# Altium PCB PCB_BLU_2.PcbDoc
Units mm, origin at the board's own origin, x right, y up, seen from the top; angles counter-clockwise.
Board outline 32.18 x 84.97 mm, 2 copper layers (Top, Bottom); 74 components, 57 nets, 307 pads, 100 vias.
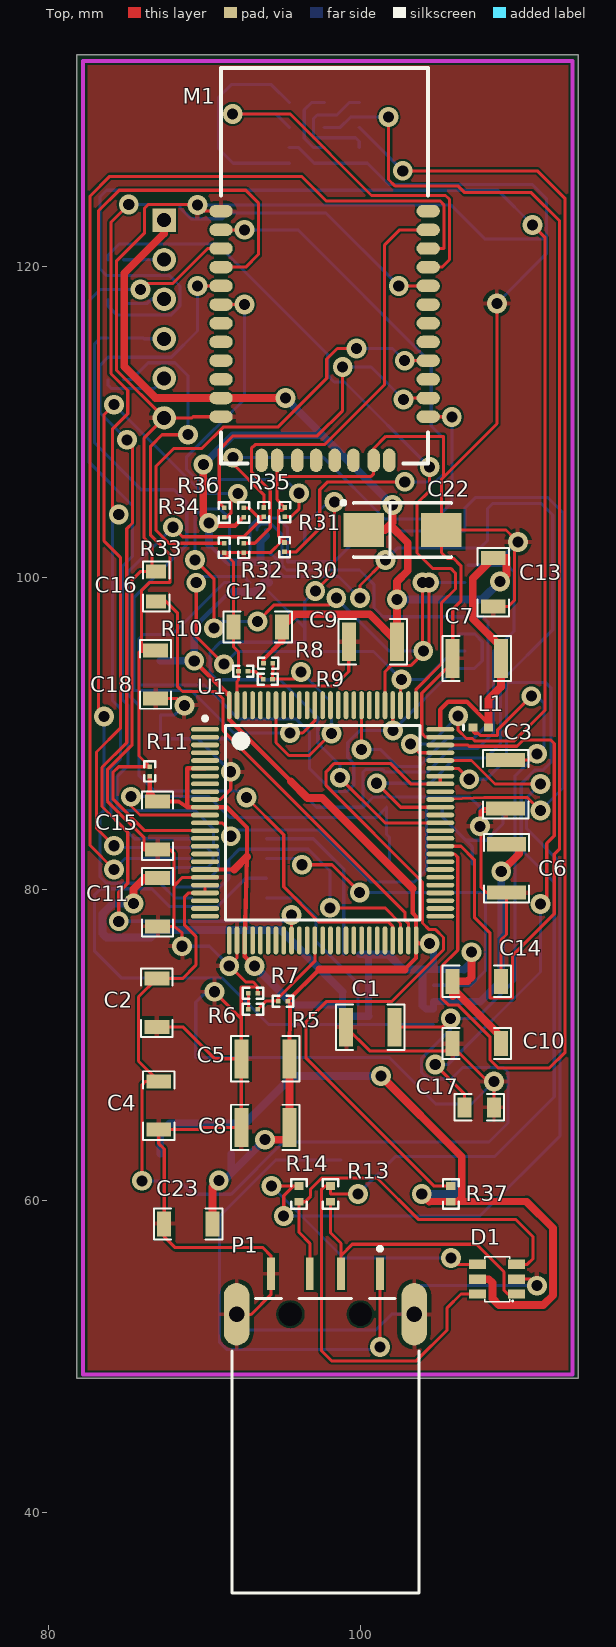
[diagram p0: Top view]
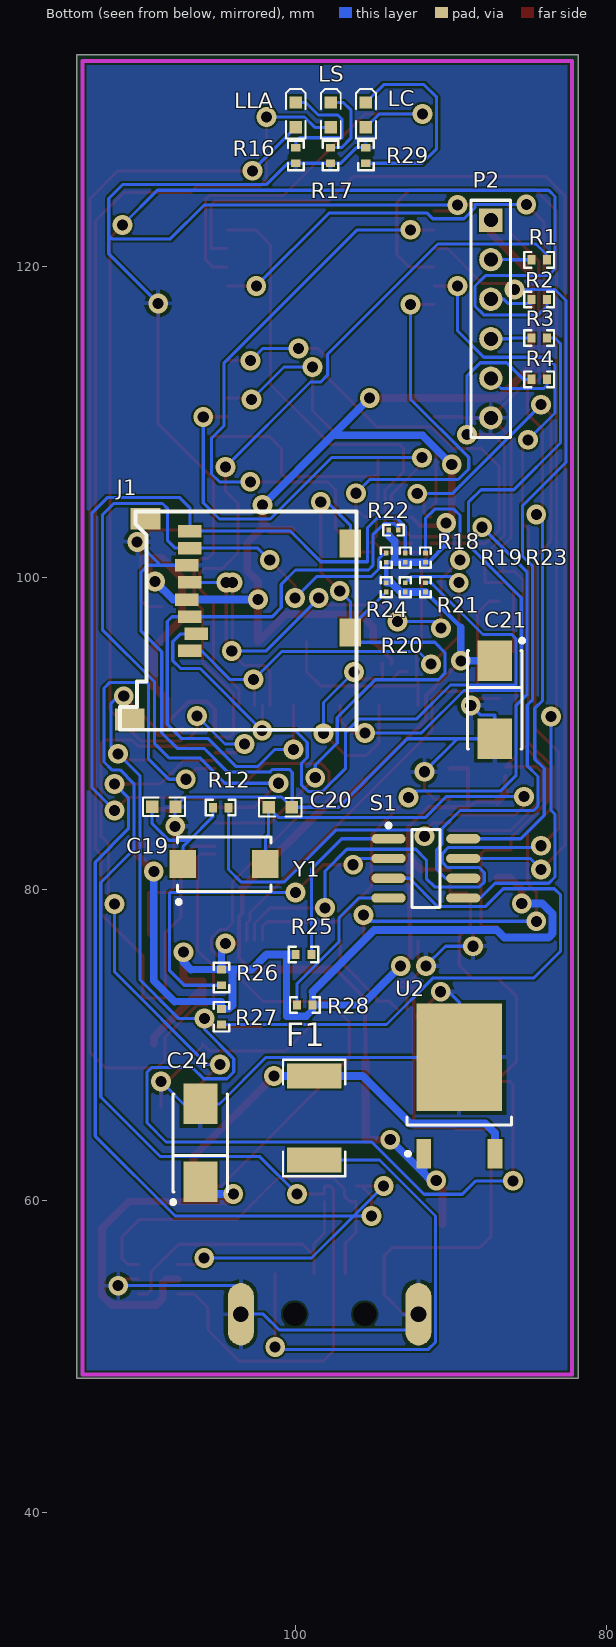
[diagram p1: Bottom view, seen from below]
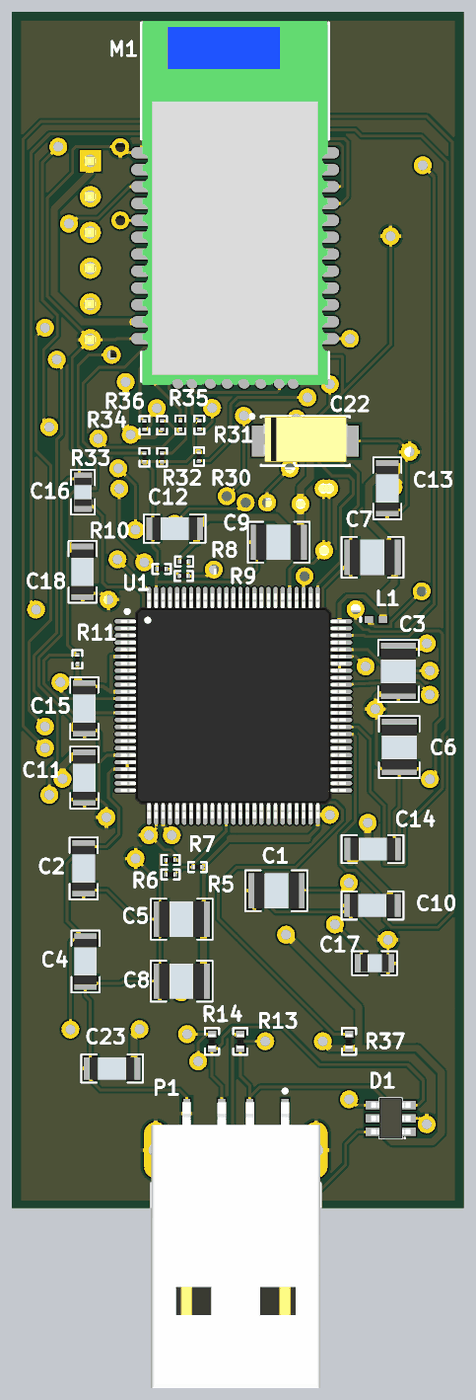
[diagram p2: 3D render of the assembled board from above, using the file's embedded part models]
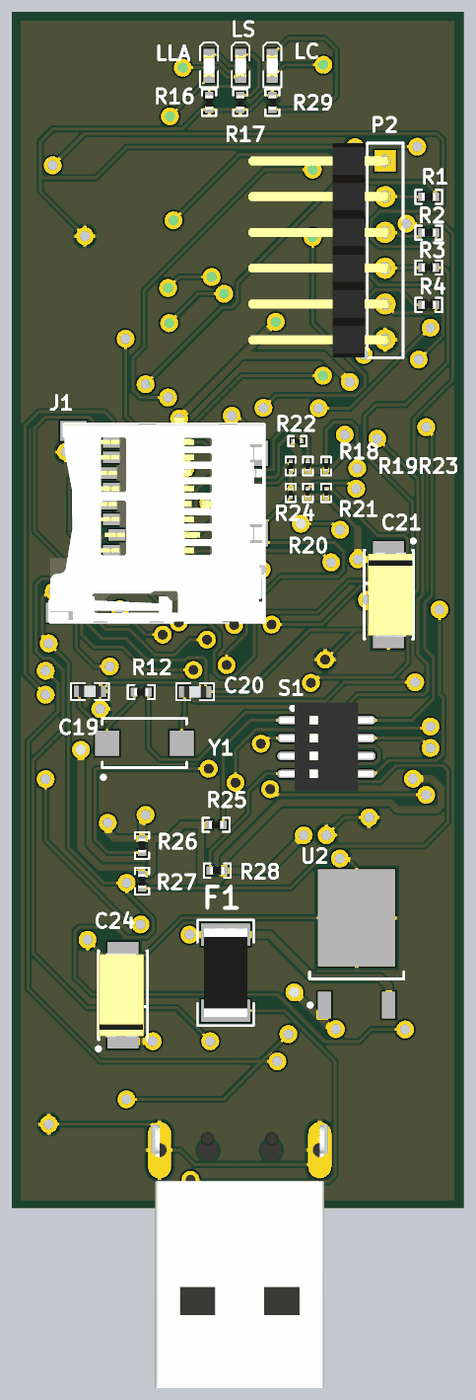
[diagram p3: 3D render of the assembled board from below, using the file's embedded part models]

## Layer stack, top to bottom
Top Solder: solder mask 0.0102, Solder Resist, Dk 3.5
Top: signal copper 0.0356
Dielectric 1: dielectric 0.32, FR-4, Dk 4.8
Bottom: signal copper 0.0356
Bottom Solder: solder mask 0.0102, Solder Resist, Dk 3.5

## Board outline
81.825,48.6 81.825,133.575 114,133.575 114,48.6

## Design rules (kind name [scope] priority, off if disabled: settings)
Clearance Clearance_U1_0.1mm [(ObjectKind = 'Pad') And (Component = 'U1')] p1: gap=0.1
Clearance Clearance_ALL [All] p2: gap=0.15
PolygonConnect [All] p1: connectstyle=Relief reliefconductorwidth=0.254 reliefentries=4 polygonreliefangle="90 Angle" airgapwidth=0.254
RoutingVias [All] p1: holewidth=0.711 width=1.27 viastyle="Through Hole" minholewidth=0.711 minwidth=1.27 maxholewidth=0.711 maxwidth=1.27
SMDNeckDown [All] p1: percent=90.000
SolderMaskExpansion [All] p1: expansion=0.102
Width "Schematic Width Constraint_1" [InNet('NetC1_1')] p1: maxlimit=0.3 minlimit=0.1 preferedwidth=0.2
Width "Schematic Width Constraint" [InNet('GND')] p2: maxlimit=0.3 minlimit=0.1 preferedwidth=0.2
Width Width_GND_0.5mm [InNet('GND')] p3: maxlimit=0.5 minlimit=0.254 preferedwidth=0.5
Width Width_3.3_0.5mm [InNet('VDD')] p4: maxlimit=0.5 minlimit=0.254 preferedwidth=0.5
Width Width_5V_0.5mm [InNet('VUSB')] p5: maxlimit=0.5 minlimit=0.254 preferedwidth=0.5
Width [All] p6: maxlimit=0.2 minlimit=0.2 preferedwidth=0.2
30 further rules are at their usual default settings.

## Classes and differential pairs
component class PCB_BLU: C1 C2 C3 C4 C5 C6 C7 C8 C9 C10 C11 C12 C13 C14 C15 C16 C17 C18 C19 C20 L1 LLA LS P2 R1 R2 R3 R4 R5 R6 R7 R8 R9 R10 R11 R12 R16 R17 U1 Y1
component class PCB_BLU3: C23 C24 D1 F1 P1 R13 R14 R37 U2
component class PCB_BLU2: C22 LC M1 R25 R26 R27 R28 R29 R30 R31 R32 R33 R34 R35 R36 S1
component class PCB_BLU1: C21 J1 R18 R19 R20 R21 R22 R23 R24

## Components (designator, comment, footprint, x,y, rotation, side; value= is the part's Value field where it differs from the comment)
C1 "1μF" "WCAP-CSGP 1210, H=1.25mm" 100.65,71.15 r180 top
C2 "100 nF" "WCAP-CSGP 1206, H=0.8mm" 86.95,72.725 r270 top
C3 "1μF" "WCAP-CSGP 1210, H=1.25mm" 109.35,86.75 r90 top
C4 "100 nF" "WCAP-CSGP 1206, H=0.8mm" 87.075,66.125 r90 top
C5 "1μF" "WCAP-CSGP 1210, H=1.25mm" 93.925,69.125 r0 top
C6 "1μF" "WCAP-CSGP 1210, H=1.25mm" 109.4,81.35 r90 top
C7 "1μF" "WCAP-CSGP 1210, H=1.25mm" 107.5,94.825 r0 top
C8 "1μF" "WCAP-CSGP 1210, H=1.25mm" 93.925,64.725 r0 top
C9 "1μF" "WCAP-CSGP 1210, H=1.25mm" 100.825,95.9 r0 top
C10 "100 nF" "WCAP-CSGP 1206, H=0.8mm" 107.5,70.1 r0 top
C11 "100 nF" "WCAP-CSGP 1206, H=0.8mm" 87,79.175 r90 top
C12 "100 nF" "WCAP-CSGP 1206, H=0.8mm" 93.425,96.85 r0 top
C13 "100 nF" "WCAP-CSGP 1206, H=0.8mm" 108.55,99.725 r90 top
C14 "100 nF" "WCAP-CSGP 1206, H=0.8mm" 107.5,74.1 r180 top
C15 "100 nF" "WCAP-CSGP 1206, H=0.8mm" 87,84.1 r90 top
C16 "2.2μF" "WCAP-CSGP 0805, H=1.25mm" 86.9,99.45 r90 top
C17 "2.2μF" "WCAP-CSGP 0805, H=1.25mm" 107.65,66 r0 top
C18 "100 nF" "WCAP-CSGP 1206, H=0.8mm" 86.875,93.8 r90 top
C19 "20 pF" "WCAP-CSGP 0603, H=0.8mm" 108.425,85.3 r0 bottom
C20 "20 pF" "WCAP-CSGP 0603, H=0.8mm" 100.95,85.275 r0 bottom
C21 "22uF" 6032 87.175,92.175 r270 bottom
C22 "22uF" 6032 102.725,103.075 r0 top
C23 "100 nF" "WCAP-CSGP 1206, H=0.8mm" 88.975,58.525 r0 top
C24 "22uF" 6032 106.075,63.725 r90 bottom
D1 "VDC = 5V" SOT23-6L 108.8,54.975 r90 top
F1 "300mA" RES2512R 98.775,65.325 r270 bottom
J1 "MICROSD" MICROSD 96.05,104.25 r90 bottom
L1 "Inductor" 0402-A 107.75,90.4 r0 top
LC "150060BS75000" LED_0603_Blue 95.45,129.725 r90 bottom
LLA "150060RS75000" LED_0603_Red 99.95,129.725 r90 bottom
LS "150060GS75000" LED_0603_Green 97.7,129.725 r90 bottom
M1 "RN42 Module" RN42-LAND 91.075,107.35 r0 top
P1 "1470695-4" 1470695A 97.775,50.025 r270 top
P2 "SWD" HDR1X6 87.425,122.975 r270 bottom
R1 "22" RES0402R 84.325,120.425 r180 bottom
R2 "22" RES0402R 84.325,117.875 r180 bottom
R3 "22" RES0402R 84.325,115.4 r180 bottom
R4 "22" RES0402R 84.325,112.75 r0 bottom
R5 "10k" RES0201R 95.05,72.825 r0 top
R6 "510" RES0201R 93.125,72.3 r0 top
R7 "0" RES0201R 93.125,73.325 r180 top
R8 "10k" RES0201R 94.1,94.525 r180 top
R9 "510" RES0201R 94.075,93.5 r0 top
R10 "0" RES0201R 92.5,94 r0 top
R11 "100k" RES0201R 86.5,87.575 r90 top
R12 "220" RES0402R 104.775,85.25 r180 bottom
R13 "22" RES0402R 98.1,60.45 r90 top
R14 "22" RES0402R 96.075,60.45 r90 top
R16 "510" RES0402R 99.95,127.125 r90 bottom
R17 "510" RES0402R 97.725,127.125 r90 bottom
R18 "100kOm" RES0201R 94.15,101.3 r270 bottom
R19 "100kOm" RES0201R 92.925,101.3 r270 bottom
R20 "100kOm" RES0201R 92.925,99.4 r270 bottom
R21 "100kOm" RES0201R 91.625,99.4 r270 bottom
R22 "100kOm" RES0201R 93.675,103.075 r0 bottom
R23 "100kOm" RES0201R 91.625,101.3 r270 bottom
R24 "100kOm" RES0201R 94.15,99.4 r270 bottom
R25 "100k" RES0402R 99.45,75.825 r0 bottom
R26 "100k" RES0402R 104.725,74.35 r90 bottom
R27 "100k" RES0402R 104.725,71.825 r90 bottom
R28 "100k" RES0402R 99.375,72.575 r180 bottom
R29 "510" RES0402R 95.45,127.125 r90 bottom
R30 "100k" RES0201R 95.15,101.975 r90 top
R31 "100k" RES0201R 95.175,104.225 r90 top
R32 "100k" RES0201R 92.525,101.925 r90 top
R33 "100k" RES0201R 91.275,101.925 r90 top
R34 "510" RES0201R 91.275,104.2 r90 top
R35 "510" RES0201R 93.825,104.225 r90 top
R36 "100k" RES0201R 92.525,104.2 r90 top
R37 "22" RES0402R 105.825,60.45 r90 top
S1 "SW DIP-4" SO8_N 91.6,81.35 r180 bottom
U1 "STM32F407VGT6" STM-LQFP100_N 97.6,84.275 r0 top
U2 "LP38690DTX-3.3" TD03B_N 89.45,67.375 r90 bottom
Y1 "8 Mhz" 3SMXA 104.55,81.625 r180 bottom

## Footprints (in the part's own frame and the unit in brackets; to place one, negate y for a bottom-side part, rotate by r counter-clockwise, add the part's x,y. Pads: shape width x height; smd on the part's side, far side on the other; paste and mask are expansions set on the pad)
3SMXA [mm] "Quartz Crystal, SM; Body 6.2 x 3.7 mm (LxW max)"
  rect 1.7x1.8 smd: 1(-2.65,0) 2(2.65,0)
  silkscreen extent -3.04,-2.55 3,1.75, body extent -2.7,-1.4 2.7,1.4, height 1.3
0402-A [mm] "Chip Inductor, Body 1.0x0.5mm, IPC High Density"
  rect 0.6x0.5 smd: 1(-0.5,0) 2(0.5,0)
  silkscreen extent -1.1,-0.15 -1.1,0.15, body extent -0.55,-0.3 0.55,0.3, height 0.55
6032 [mm] "Capacitor, SM Tantalum; Body 6.0 x 3.2 mm (LxW typ)"
  rect 2.6x2.2 smd: 1(-2.5,0) 2(2.5,0)
  silkscreen extent -3.92,-1.75 3.15,1.87, body extent -3,-1.47 3,1.73, height 2.51
1470695A [mm] "Connector; USB1.1, Type A, SM; 4 Position; Right Angle"
  rect 2.1x0.5 smd: 1(-5.3,3.5) 2(-5.3,1) 3(-5.3,-1) 4(-5.3,-3.5)
  oval 4x1.65 hole 1: 5(-2.7,-5.7) 6(-2.7,5.7)
  round 1.2 hole 1.5 unplated: MH1(-2.7,-2.25) MH2(-2.7,2.25)
  silkscreen extent -7.02,-6 15.2,6, body extent -6.1,-6.3 14.2,6.3, height 3.15
HDR1X6 [mm] "Connector; Header; 6 Position"
  rect 1.5x1.5 hole 0.9: 1(0,0)
  round 1.5 hole 0.9: 2(2.54,0) 3(5.08,0) 4(7.62,0) 5(10.16,0) 6(12.7,0)
  silkscreen extent -1.27,-1.27 13.97,1.27, body extent -1.27,-9.75 13.97,0.38, height 2.51
LED_0603_Blue [mm] "Chip LED, 2-Leads, Body 1.6x0.8mm, IPC Medium Density"
  rect 0.8x0.8 smd: 1(-0.8,0) 2(0.8,0)
  silkscreen extent -1.52,-0.64 1.65,0.64, body extent -0.8,-0.4 0.8,0.4, height 0.7
LED_0603_Green [mm] "Chip LED, 2-Leads, Body 1.6x0.8mm, IPC Medium Density"
  rect 0.8x0.8 smd: 1(-0.8,0) 2(0.8,0)
  silkscreen extent -1.52,-0.64 1.65,0.63, body extent -0.8,-0.4 0.8,0.4, height 0.7
LED_0603_Red [mm] "Chip LED, 2-Leads, Body 1.6x0.8mm, IPC Medium Density"
  rect 0.8x0.8 smd: 1(-0.8,0) 2(0.8,0)
  silkscreen extent -1.52,-0.63 1.65,0.64, body extent -0.8,-0.4 0.8,0.4, height 0.7
MICROSD [mm]
  rect 0.8x1.5 smd: 1(-8.94,10.7) 2(-7.84,10.3) 3(-6.74,10.7) 4(-5.64,10.9) 5(-4.54,10.7) 6(-3.44,10.9) 7(-2.34,10.7) 8(-1.24,10.7)
  rect 1.4x1.9 smd: 9(-13.35,14.55) 9(-0.45,13.55)
  rect 1.8x1.4 smd: 10(-7.75,0.4) 10(-2.05,0.4)
  silkscreen extent -14,0 0,15.2, body extent -14.05,0 0.05,15.2, height 1.85
RES0201R [mm] "resistor 0201 reflow soldering"
  rect 0.3x0.3 smd paste+0 mask+0.075: 1(-0.3,0) 2(0.3,0)
  silkscreen extent -0.65,-0.35 0.65,0.35, body extent -0.3,-0.15 0.3,0.15, height 0.3
RES0402R [mm] "resistor 0402 reflow soldering"
  rect 0.5x0.6 smd: 1(-0.5,0) 2(0.5,0)
  silkscreen extent -0.95,-0.5 0.95,0.5, body extent -0.5,-0.25 0.5,0.25, height 0.3
RES2512R [mm] "resistor 2512 reflow soldering"
  rect 1.6x3.5 smd: 1(-2.7,0) 2(2.7,0)
  silkscreen extent -3.75,-2 3.75,2, body extent -3.15,-1.55 3.15,1.55, height 0.55
RN42-LAND [mm] "RN42 Footprint"
  oval 1.5x0.8 smd: 1(0,16.2) 2(0,15) 3(0,13.8) 4(0,12.6) 5(0,11.4) 6(0,10.2) 7(0,9) 8(0,7.8) 9(0,6.6) 10(0,5.4) 11(0,4.2) 12(0,3) 13(13.3,3) 14(13.3,4.2) 15(13.3,5.4) 16(13.3,6.6) 17(13.3,7.8) 18(13.3,9) 19(13.3,10.2) 20(13.3,11.4) 21(13.3,12.6) 22(13.3,13.8) 23(13.3,15) 24(13.3,16.2)
  oval 0.8x1.5 smd: 28(9.8,0.2) 29(3.6,0.2) 30(10.8,0.2) 31(8.5,0.2) 32(7.3,0.2) 33(6.1,0.2) 34(4.9,0.2) 35(2.6,0.2)
  silkscreen extent 0,0 13.3,25.4, body extent 0.05,-0.27 13.25,25.53, height 2.1
SO8_N [mm] "SOIC, 8-Leads, Body 4.9x3.9mm, Pitch 1.27mm, IPC Medium Density"
  oval 2.2x0.6 smd: 1(-2.4,1.905) 2(-2.4,0.635) 3(-2.4,-0.635) 4(-2.4,-1.905) 5(2.4,-1.905) 6(2.4,-0.635) 7(2.4,0.635) 8(2.4,1.905)
  silkscreen extent -2.53,-2.5 0.9,2.88, body extent -3.35,-3.15 3.35,3.16, height 1.55
SOT23-6L [mm] "WE-TVS TVS Diode, Body 2.9*2.8mm, 6 leads"
  rect 0.6x1.1 smd: 1(-0.95,-1.25) 2(0,-1.25) 3(0.95,-1.25) 4(0.95,1.25) 5(0,1.25) 6(-0.95,1.25)
  silkscreen extent -1.45,-1.03 1.45,0.8, body extent -1.45,-1.4 1.45,1.4, height 1.12
STM-LQFP100_N [mm] "Thin QFP, 100-Leads, Body 14x14mm, Pitch 0.5mm, IPC Medium Density"
  oval 1.8x0.3 smd: 1(-7.55,6) 2(-7.55,5.5) 3(-7.55,5) 4(-7.55,4.5) 5(-7.55,4) 6(-7.55,3.5) 7(-7.55,3) 8(-7.55,2.5) 9(-7.55,2) 10(-7.55,1.5) 11(-7.55,1) 12(-7.55,0.5) 13(-7.55,0) 14(-7.55,-0.5) 15(-7.55,-1) 16(-7.55,-1.5) 17(-7.55,-2) 18(-7.55,-2.5) 19(-7.55,-3) 20(-7.55,-3.5) 21(-7.55,-4) 22(-7.55,-4.5) 23(-7.55,-5) 24(-7.55,-5.5) 25(-7.55,-6) 51(7.55,-6) 52(7.55,-5.5) 53(7.55,-5) 54(7.55,-4.5) 55(7.55,-4) 56(7.55,-3.5) 57(7.55,-3) 58(7.55,-2.5) 59(7.55,-2) 60(7.55,-1.5) 61(7.55,-1) 62(7.55,-0.5) 63(7.55,0) 64(7.55,0.5) 65(7.55,1) 66(7.55,1.5) 67(7.55,2) 68(7.55,2.5) 69(7.55,3) 70(7.55,3.5) 71(7.55,4) 72(7.55,4.5) 73(7.55,5) 74(7.55,5.5) 75(7.55,6)
  oval 0.3x1.8 smd: 26(-6,-7.55) 27(-5.5,-7.55) 28(-5,-7.55) 29(-4.5,-7.55) 30(-4,-7.55) 31(-3.5,-7.55) 32(-3,-7.55) 33(-2.5,-7.55) 34(-2,-7.55) 35(-1.5,-7.55) 36(-1,-7.55) 37(-0.5,-7.55) 38(0,-7.55) 39(0.5,-7.55) 40(1,-7.55) 41(1.5,-7.55) 42(2,-7.55) 43(2.5,-7.55) 44(3,-7.55) 45(3.5,-7.55) 46(4,-7.55) 47(4.5,-7.55) 48(5,-7.55) 49(5.5,-7.55) 50(6,-7.55) 76(6,7.55) 77(5.5,7.55) 78(5,7.55) 79(4.5,7.55) 80(4,7.55) 81(3.5,7.55) 82(3,7.55) 83(2.5,7.55) 84(2,7.55) 85(1.5,7.55) 86(1,7.55) 87(0.5,7.55) 88(0,7.55) 89(-0.5,7.55) 90(-1,7.55) 91(-1.5,7.55) 92(-2,7.55) 93(-2.5,7.55) 94(-3,7.55) 95(-3.5,7.55) 96(-4,7.55) 97(-4.5,7.55) 98(-5,7.55) 99(-5.5,7.55) 100(-6,7.55)
  silkscreen extent -7.67,-6.25 6.25,6.82, body extent -8,-8 8,8, height 1.6
TD03B_N [mm] "D-PAK, 4-Leads, Body 6.1x6.6mm, Pitch 2.29mm, Lead Span 9.7mm, IPC Medium Density"
  rect 1.9x0.95 smd: 1(-4.35,2.28) 3(-4.35,-2.28)
  rect 6.9x5.5 smd: 4(1.85,0)
  silkscreen extent -4.47,-3.35 -2,3.43, body extent -2.5,-3.35 3.7,3.35, height 2.38
"WCAP-CSGP 0603, H=0.8mm" [mm] "MLCC 0603, H=0.8mm"
  rect 0.8x0.8 smd: 1(-0.75,0) 2(0.75,0)
  silkscreen extent -1.35,-0.6 1.35,0.6, body extent -0.8,-0.4 0.8,0.4, height 0.77
"WCAP-CSGP 0805, H=1.25mm" [mm] "MLCC 0805, H=1.25mm"
  rect 0.9x1.3 smd: 1(-0.95,0) 2(0.95,0)
  silkscreen extent -1.6,-0.85 1.6,0.85, body extent -1,-0.63 1,0.62, height 1.22
"WCAP-CSGP 1206, H=0.8mm" [mm] "MLCC 1206, H=0.8mm"
  rect 0.9x1.6 smd: 1(-1.55,0) 2(1.55,0)
  silkscreen extent -2.2,-1 2.2,1, body extent -1.61,-0.8 1.59,0.8, height 0.8
"WCAP-CSGP 1210, H=1.25mm" [mm] "MLCC 1210, H=0.95mm"
  rect 0.9x2.5 smd: 1(-1.55,0) 2(1.55,0)
  silkscreen extent -2.2,-1.45 2.2,1.45, body extent -1.62,-1.25 1.58,1.25, height 2

## Part data
C1 C3 C5 C6 C7 C8 C9: library part "WCAP-CSGP 1210, 885012209011", "WCAP-CSGP MLCC, X7R, 1210, 1?F pF,16Vdc"
C2 C4 C10 C11 C12 C13 C14 C15 C18 C23: library part "WCAP-CSGP 1206, 885012208009", "WCAP-CSGP MLCC, X7R, 1206, 100000 pF,10Vdc"
C16 C17: library part "WCAP-CSGP 0805, 885012207024", "WCAP-CSGP MLCC, X7R, 0805, 2.2?F ,10Vdc"
C19 C20: library part "WCAP-CSGP 0603, 885012006004", "WCAP-CSGP MLCC, NP0, 0603, 22 pF,10Vdc"
C21 C22 C24: library part CWR11DH226M, "Tantamount Military, Surface Mount MIL-PRF-55365/8 Qualified Solid Tantalum Chip Capacitor: 22uF, 20% Tolerance, 6 WVDC @ +85°C, Surge = 8V"
D1: library part "WE-TVS, SOT23-6L, 824015", "WE-TVS TVS Diode, High Speed Series, SOT23-6L, VDC = 5V"
F1: library part "Fuse 1", "Fuse"
J1: "=Description"
LC: library part "WL-SMCW 0603  150060BS75000", "SMD mono-color Chip LED, WL-SMCW, Blue"
LLA: library part "WL-SMCW 0603  150060RS75000", "SMD mono-color Chip LED, WL-SMCW, Red"
LS: library part "WL-SMCW 0603  150060GS75000", "SMD mono-color Chip LED, WL-SMCW, Green"
M1: library part RN42MOD
P1: "USB 1.1, Right Angle, SMT, A Type, Plug, 4 Position, Black"
P2: library part "Header 6", "Header, 6-Pin"
R1 R2 R3 R4 R5 R6 R7 R8 R9 R10 R11 R12 R13 R14 R16 R17 R18 R19 R20 R21 R22 R23 R24 R25 R26 R27 R28 R29 R30 R31 R32 R33 R34 R35 R36 R37: library part Resistor1, "Resistor"
S1: "DIP Switch, 4 Position, SPST"
U1: "ARM Cortex-M4 32-bit MCU+FPU, 210 DMIPS, 1024 kB Flash, 192 kB Internal RAM, 82 I/Os, 100-pin LQFP, -40 to 85 degC, Tray"
U2: "1A Low Dropout CMOS Linear Regulators Stable with Ceramic Output Capacitors, 3-pin TO-252"
Y1: library part XTAL, "Crystal Oscillator"

## Via types
v1: diameter 1.27, hole 0.711, Top to Bottom, 100 vias

## Nets (pads, with @x,y where several pads share a name; then routed paths per layer and width w, separated by ;. In a path a pad name is that pad's centre, name@x,y a point inside that pad or via, vN(x,y) a via of type N, cw(c..) or ccw(c..) an arc to the next point about the centre after c; other vN are vias at no path point)
GND: C1.2 C2.2 C3.1 C4.1 C5.1 C6.1 C7.1 C8.1 C9.1 C10.1 C11.1 C12.1 C13.1 C14.1 C15.1 C16.2 C17.2 C18.1 C19.1 C20.1 C21.2 C22.2 C23.1 C24.2 D1.2 J1.6 M1.1 M1.12 M1.28 M1.29 P1.4 P1.5 P1.6 P2.6 R7.1 R10.1 R16.1 R17.1 R29.2 R30.2 R31.2 R32.1 R33.1 U1.10 U1.20 U1.27 U1.74 U1.99 U2.4 | length 400
  Top w0.2: C18.1 88.282,92.25 v1(88.719,91.813) ; C16.2 C16.2@86.648,100.4 ; C2.2 88.621,71.175 90.671,69.125 C5.1 ; C11.1 88.062,77.625 ; v1(88.57,76.352) 88.57,77.216 88.062,77.625 ; v1(89.56,123.952) v1@89.586,123.952 ; U1.20 88.595,80.775 88.062,80.242 ; U1.10 91.034,85.775 91.694,86.435 v1(91.694,87.554) ; v1(90.648,73.431) 92.375,71.704 ; M1.12 89.28,110.35 89.205,110.275 P2.6 ; M1.1 89.988,123.55 v1@89.586,123.952 ; v1(91.6,75.09) v1@91.621,75.09 ; P1.5 92.075,52.705 93.005,52.705 94.275,53.975 P1.4 94.275,56.49 93.767,56.998 88.136,56.998 87.425,57.709 C23.1 87.425,63.329 87.075,63.679 C4.1 89.637,64.575 89.787,64.725 C8.1 C5.1 ; U1.27 92.1,75.59 v1@91.621,75.09 ; U1.99 92.1,93.066 ; R7.1 93.425,73.736 ; M1.29 94.675,106.737 ; R30.2 R30.2@95.022,102.403 ; C1.2 100.613,69.637 105.487,69.637 C10.1@105.863,70.013 ; C9.1 99.275,93.992 98.349,93.066 92.1,93.066 ; U1.74 104.205,89.775 103.962,90.018 103.962,92.602 105.95,94.59 C7.1 105.95,97.983 106.473,98.506 106.473,100.787 106.017,101.243 105.608,101.243 105.225,101.625 C22.2 ; C10.1 C10.1@105.863,70.013 ; v1(107.696,84.049) 107.696,84.938 ; C13.1 109.529,98.175 109.906,98.552 v1@109.906,102.54 ; C17.2 v1@108.6,67.276 ; v1(108.6,67.666) v1@108.6,67.276 ; v1(108.788,117.627) 108.788,109.906 105.355,106.473 ; C14.1 109.05,76.759 109.4,77.109 C6.1 108.102,79.8 107.776,80.126 107.776,84.938 107.696,84.938 ; D1.2 110.938,54.975 v1(111.354,54.559) ; v1(110.134,102.311) v1@109.906,102.54 ; C16.2@86.648,100.4 86.648,102.055 86.138,102.565 86.138,108.988 P2.6 ; C16.2@86.648,100.4 85.887,100.4 85.367,99.88 85.367,89.279 83.778,87.689 83.778,85.672 86.135,83.315 86.135,82.55 C15.1 87.808,82.55 88.062,82.296 88.062,80.242 ; P2.6 84.355,113.345 84.355,120.336 86.17,122.151 86.17,123.749 86.399,123.977 89.535,123.977 89.565,123.962 v1@89.586,123.952 ; 88.062,77.625 88.062,80.242 ; v1@91.621,75.09 92.659,74.052 93.131,74.052 93.425,73.736 ; 92.1,93.066 92.1,93.345 92.2,93.445 R10.1 92.2,95.25 91.875,95.575 C12.1 91.875,101.025 R33.1 R32.1 94.244,101.625 R30.2@95.022,102.403 ; C5.1 92.375,71.704 ; 92.375,71.704 92.375,73.736 93.425,73.736 ; 94.675,106.737 94.675,105.025 R31.2 94.993,104.343 94.767,104.343 94.767,102.658 R30.2@95.022,102.403 ; 94.675,106.737 94.894,106.518 100.713,106.518 100.875,106.68 M1.28 100.875,108.306 101.658,109.089 105.34,109.089 105.355,109.073 105.355,106.473 ; C22.2 105.225,106.343 105.355,106.473 ; C22.2 109.371,103.075 v1@109.906,102.54 ; C10.1@105.863,70.013 v1@108.6,67.276 ; 107.696,84.938 107.696,84.997 107.899,85.2 C3.1 107.696,84.938
  Bottom w0.2: v1(88.57,76.352) 90.337,76.352 v1(91.6,75.09) ; v1(88.719,91.813) 88.112,91.206 87.175,91.206 C21.2 89.573,89.675 ; v1(89.56,123.952) 105.816,123.952 108.001,121.768 111.76,121.768 111.963,121.971 ; v1(90.648,73.431) 90.136,73.431 89.45,72.746 U2.4 89.45,69.215 101.861,69.215 104.851,66.225 C24.2 107.159,66.225 v1(108.6,67.666) ; v1(91.694,87.554) 89.573,89.675 ; P1.5 92.075,51.714 101.016,51.714 102.032,52.73 P1.6@103.475,52.73 ; R29.2 96.063,127.625 97.063,126.625 R17.1 R16.1 100.476,126.625 101.854,125.247 111.074,125.247 111.963,124.358 111.963,121.971 ; P1.6 P1.6@103.475,52.73 ; J1.6 108.633,100.81 ; v1(107.696,84.049) 107.696,85.279 C19.1 107.043,85.932 100.857,85.932 C20.1 ; v1(108.788,117.627) 111.963,120.802 111.963,121.971 ; v1(110.134,102.311) 108.633,100.81 ; v1(111.354,54.559) 103.475,54.559 P1.6@103.475,52.73 ; 89.573,89.675 92.799,89.675 97.199,85.275 C20.1 ; C20.1 100.2,85.906 100.178,85.928 100.178,87.503 100.381,87.706 101.448,87.706 101.625,87.528 104.318,87.528 105.842,89.052 107.569,89.052 108.56,90.043 108.56,95.25 109.88,96.571 109.88,100.381 109.451,100.81 108.633,100.81
NetC1_1: C1.1 C2.1 C3.2 C4.2 L1.1 U1.21 U1.22 | length 99.9
  Top w0.2: v1(86.004,61.29) 86.004,67.462 86.217,67.675 C4.2 85.776,68.974 85.776,73.101 C2.1 88.595,74.275 89.459,75.139 89.459,76.987 88.722,77.724 88.722,79.496 89.002,79.775 U1.22 U1.21 ; C1.1 102.2,71.171 105.283,71.171 v1(105.816,71.704) ; L1.1 107.25,90.133 107.357,90.027 107.571,90.027 107.707,89.891 108.814,89.891 108.814,90.221 v1(110.998,92.405) ; C3.2 110.957,88.3 v1(111.363,88.706)
  Bottom w0.2: v1(86.004,61.29) 88.392,61.29 89.256,60.427 91.719,60.427 95.072,63.779 108.28,63.779 109.499,64.999 109.499,68.275 109.22,68.555 106.578,68.555 105.867,67.843 104.369,67.843 103.937,68.275 103.937,69.139 105.816,71.018 v1(105.816,71.704) 107.467,71.704 109.957,74.193 109.957,87.3 v1(111.363,88.706) 111.811,89.154 111.811,91.948 111.354,92.405 v1(110.998,92.405)
NetC16_1: C16.1 U1.49 | length 30.1
  Top w0.2: C16.1 87.528,98.5 88.29,97.738 88.29,93.015 88.595,92.71 90.729,92.71 91.211,92.227 91.211,90.195 102.895,78.511 102.895,78.029 103.1,77.824 U1.49
NetC17_1: C17.1 U1.73 | length 35.4
  Top w0.2: v1(104.826,68.752) 106.7,66.878 C17.1 ; U1.73 106.922,89.275 107.007,89.191 110.077,89.191 110.478,89.591 112.248,89.591 112.467,89.372 112.467,83.435 111.989,82.956 111.989,79.477 v1(111.582,79.07)
  Bottom w0.2: v1(104.826,68.752) 105.639,68.752 111.582,74.696 v1(111.582,79.07)
NetC18_2: C18.2 R4.2 R11.2 U1.14 | length 47.2
  Top w0.2: v1(88.951,109.195) 87.287,109.195 86.55,108.458 86.55,102.73 87.808,101.473 87.808,99.695 86.462,99.695 85.979,99.212 85.979,95.35 C18.2 85.811,95.233 85.811,88.564 R11.2 84.497,87.875 84.128,87.506 84.128,85.817 86.17,83.775 U1.14
  Bottom w0.2: R4.2 85.346,112.75 86.411,113.815 88.115,113.815 88.951,112.979 v1(88.951,109.195)
NetC19_2: C19.2 R12.1 Y1.1 | length 8.3
  Bottom w0.2: R12.1 105.275,84.658 106.779,83.154 ; Y1.1 107.2,82.733 106.779,83.154 ; C19.2 109.175,84.226 108.102,83.154 106.779,83.154
NetC20_2: C20.2 U1.12 Y1.2 | length 26.6
  Top w0.2: v1(85.293,85.954) 85.293,85.352 85.87,84.775 U1.12
  Bottom w0.2: v1(85.293,85.954) 90.305,85.954 91.647,84.611 101.036,84.611 C20.2 101.7,83.537 101.9,83.337 Y1.2
NetD1_1: D1.1 P1.2 R13.1 | length 18.5
  Top w0.2: R13.1 98.1,57.952 98.775,57.277 98.775,56.49 ; P1.2 98.775,56.49 ; D1.1 109.476,54.025 109.246,54.254 109.246,55.447 107.477,57.216 99.502,57.216 98.775,56.49
NetD1_3: D1.3 P1.3 R14.1 | length 25
  Top w0.2: P1.3 96.775,57.277 96.075,57.977 R14.1 96.475,59.95 96.829,60.304 96.829,60.761 97.536,61.468 101.092,61.468 103.759,58.801 110.007,58.801 111.1,57.709 111.1,56.281 110.744,55.925 D1.3
NetD1_4: D1.4 R14.2 U1.71 | length 70
  Top w0.2: v1(94.31,60.96) 94.32,60.95 95.707,60.95 ; v1(95.098,59.03) 95.098,60.34 95.707,60.95 ; R14.2 95.707,60.95 ; U1.71 107.153,88.275 108.661,86.766 v1(111.582,86.766) ; v1(105.832,56.331) 106.238,55.925 D1.4
  Bottom w0.2: v1(94.31,60.96) 96.241,59.03 ; v1(95.098,59.03) 96.241,59.03 ; v1(105.832,56.331) 98.939,56.331 96.241,59.03 ; v1(111.582,86.766) 110.697,85.881 110.697,83.884 112.827,81.755 112.827,64.16 107.696,59.03 96.241,59.03
NetD1_6: D1.6 R13.2 U1.70 | length 82.5
  Top w0.2: v1(99.873,60.452) 98.1,60.452 R13.2 97.739,60.95 97.536,60.747 97.536,50.368 98.171,49.733 103.607,49.733 105.588,51.714 105.588,53.136 106.477,54.025 D1.6 ; U1.70 106.306,87.775 v1(107.01,87.071)
  Bottom w0.2: v1(99.873,60.452) 102.26,62.84 108.636,62.84 112.471,66.675 112.471,80.442 110.347,82.566 110.347,86.792 111.228,87.673 111.76,87.673 112.268,88.181 112.268,92.913 111.887,93.294 109.525,93.294 109.398,93.167 109.398,88.367 108.102,87.071 v1(107.01,87.071)
NetF1_2: F1.2 P1.1 | length 32.6
  Top w0.2: v1(101.275,50.622) P1.1
  Bottom w0.2: F1.2 94.578,62.625 90.983,59.03 90.983,50.927 91.44,50.47 101.123,50.47 v1(101.275,50.622)
NetJ1_1: J1.1 R20.1 U1.78 | length 29.2
  Top w0.2: v1(89.484,99.695) 89.484,96.241 v1(91.262,94.463) ; U1.78 v1@102.6,92.999 ; v1@102.6,92.999 v1(102.667,93.472) 102.667,93.066 v1@102.6,92.999
  Bottom w0.2: v1(89.484,99.695) 89.891,100.101 92.524,100.101 R20.1 ; v1(91.262,94.463) 92.075,95.275 100.863,95.275 v1(102.667,93.472) 104.152,93.472 105.99,95.31 J1.1
NetJ1_2: J1.2 R21.1 U1.79 | length 46.7
  Top w0.2: U1.79 102.1,90.203 v1(102.108,90.195)
  Bottom w0.2: R21.1 91.267,99.7 87.933,96.366 86.077,96.366 85.825,96.114 85.825,93.125 90.016,93.125 92.209,90.932 95.91,90.932 96.749,90.094 96.749,87.782 98.247,86.284 99.162,86.284 99.593,86.716 99.593,88.087 99.212,88.468 99.212,89.433 99.974,90.195 v1(102.108,90.195) 106.096,94.183 107.34,94.183 107.848,94.691 107.848,95.91 107.349,96.41 J1.2
NetJ1_3: J1.3 R22.1 U1.83 | length 38.9
  Top w0.2: v1(100.1,88.976) U1.83
  Bottom w0.2: R22.1 93.375,103.226 93.629,103.48 94.285,103.48 95,102.764 95,100.787 95.281,100.506 99.968,100.506 100.885,99.589 100.885,98.098 101.473,97.51 J1.3 107.9,97.51 108.204,97.206 108.204,90.594 107.31,89.701 105.601,89.701 103.784,87.884 102.411,87.884 101.319,88.976 v1(100.1,88.976)
NetJ1_5: J1.5 R23.1 U1.80 | length 45.2
  Top w0.2: v1(89.408,101.143) 90.627,99.924 v1(90.627,96.774) ; v1(93.421,97.206) 94.488,98.273 98.044,98.273 v1(98.476,98.704) ; U1.80 101.6,93.98 102.006,94.386 103.276,94.386 104.013,95.123 v1(104.013,99.71) ; v1(104.064,95.301) 104.419,95.656 v1(104.419,99.71)
  Bottom w0.2: v1(89.408,101.143) 89.408,104.013 89.814,104.419 91.034,104.419 91.625,103.828 R23.1 ; v1(90.627,96.774) 91.059,97.206 v1(93.421,97.206) ; v1(98.476,98.704) 101.879,95.301 v1(104.064,95.301) ; v1(104.013,99.71) v1(104.419,99.71) J1.5
NetJ1_7: J1.7 R18.1 U1.65 | length 54.1
  Top w0.2: v1(100,98.704) 100,99.517 v1(101.625,101.143) ; v1(101.067,86.817) 102.609,85.275 U1.65
  Bottom w0.2: R18.1 94.25,101.5 94.344,101.5 94.65,101.194 94.65,100.539 95.098,100.092 98.612,100.092 v1(100,98.704) ; v1(101.067,86.817) 104.496,86.817 106.121,88.443 108.102,88.443 109.017,89.357 109.017,93.32 112.37,96.672 112.37,104.038 111.633,104.775 108.509,104.775 108.179,104.445 108.179,102.393 107.696,101.91 J1.7 102.393,101.91 v1(101.625,101.143)
NetJ1_8: J1.8 R19.1 U1.66 | length 53.9
  Top w0.2: U1.66 107.965,85.903 110.744,85.903 v1(111.582,85.065)
  Bottom w0.2: R19.1 92.925,103.288 93.472,103.835 94.742,103.835 95.352,103.226 95.352,101.041 98.349,101.041 100.318,103.01 J1.8 106.75,104.515 107.391,105.156 112.063,105.156 113.03,104.189 113.03,86.512 v1(111.582,85.065)
NetJ1_10: J1.10 R24.2 U1.63 | length 44.6
  Top w0.2: v1(97.13,99.162) 98.349,100.381 v1(98.349,104.877) ; v1(98.704,87.173) 101.602,84.275 U1.63
  Bottom w0.2: R24.2 J1.10@96.45,96.8 ; J1.10@96.45,102.2 96.45,103.384 97.942,104.877 v1(98.349,104.877) ; v1(97.13,99.162) 96.45,98.482 J1.10@96.45,96.8 ; v1(98.704,87.173) 98.704,87.986 97.286,89.404 97.286,91.034 94.856,93.464 90.792,93.464 90.377,93.878 90.377,95.21 91.034,95.866 96.45,95.866 96.45,96.5 J1.10@96.45,96.8
NetLC_1: LC.1 M1.21 | length 25.6
  Top w0.2: v1(91.821,129.794) 95.498,129.794 100.736,124.556 105.486,124.556 105.74,124.302 105.74,120.433 105.258,119.95 M1.21
  Bottom w0.2: v1(91.821,129.794) 94.581,129.794 LC.1
NetLC_2: LC.2 R29.1 | length 13.6
  Bottom w0.2: R29.1 91.846,126.625 90.907,127.565 90.907,130.861 91.719,131.674 94.301,131.674 LC.2
NetLLA_1: LLA.1 U1.59 | length 91.7
  Top w0.2: v1(102.739,126.136) 111.379,126.136 113.167,124.348 113.167,69.545 112.166,68.544 108.856,68.544 108.35,69.05 108.35,70.517 106.278,72.589 105.664,72.589 105.232,73.021 105.232,75.057 106.274,76.098 106.274,82.072 106.07,82.275 U1.59
  Bottom w0.2: LLA.1 v1(102.739,126.136)
NetLLA_2: LLA.2 R16.2 | length 8
  Bottom w0.2: R16.2 99.95,128.016 99.707,128.259 97.003,128.259 97.003,129.464 97.261,129.722 98.506,129.722 99.308,130.525 LLA.2
NetLS_1: LS.1 U1.60 | length 85
  Top w0.2: v1(101.829,129.591) 101.829,125.578 102.235,125.171 106.28,125.171 106.712,124.739 110.998,124.739 112.817,122.92 112.817,82.61 112.471,82.264 112.471,78.435 109.779,75.743 109.779,73.025 108.331,73.025 108.331,77.216 107.34,78.207 107.34,81.911 106.477,82.775 U1.60
  Bottom w0.2: LS.1 98.73,128.925 99.396,129.591 v1(101.829,129.591)
NetLS_2: LS.2 R17.2 | length 4.9
  Bottom w0.2: LS.2 96.895,130.525 96.418,130.048 96.418,128.219 97.013,127.625 R17.2
NetM1_2: M1.2 R30.1 | length 38.2
  Top w0.2: M1.2 v1(92.583,122.35) ; R30.1 95.91,101.675 97.413,103.178 97.413,105.664 97.917,106.168 v1(102.87,106.168)
  Bottom w0.2: v1(92.583,122.35) 96.014,122.35 104.572,113.792 104.572,109.753 105.359,108.966 105.359,106.676 104.851,106.168 v1(102.87,106.168)
NetM1_3: M1.3 S1.6 | length 55.6
  Top w0.2: v1(85.903,118.516) 86.284,118.897 87.96,118.897 90.213,121.15 M1.3
  Bottom w0.2: v1(85.903,118.516) 83.312,118.516 82.604,117.809 82.604,107.428 85.391,104.641 85.391,101.393 84.746,100.747 84.746,92.188 85.09,91.843 85.09,87.935 84.404,87.249 84.404,85.344 84.684,85.065 89.408,85.065 90.58,83.892 90.58,82.885 90.9,82.565 90.9,81.28 90.335,80.715 S1.6
NetM1_4: M1.4 S1.5 | length 66.7
  Top w0.2: v1(83.566,91.11) 83.21,91.465 83.21,123.571 84.531,124.892 92.659,124.892 93.472,124.079 93.472,120.763 92.659,119.95 M1.4
  Bottom w0.2: v1(83.566,91.11) 83.566,85.09 83.312,84.836 83.312,80.801 83.718,80.395 87.166,80.395 88.116,79.445 S1.5
NetM1_5: M1.5 U1.34 | length 62.8
  Top w0.2: v1(84.506,77.953) 84.506,79.815 85.086,80.395 85.086,83.664 83.428,85.322 83.428,87.834 85.017,89.424 85.017,103.157 85.391,103.53 85.391,108.513 v1(85.039,108.864) ; v1(89.56,118.75) M1.5 ; U1.34 95.6,78.353 v1(95.606,78.359)
  Bottom w0.2: v1(84.506,77.953) 95.199,77.953 v1(95.606,78.359) ; v1(85.039,108.864) 83.312,110.592 83.312,113.665 83.812,114.165 87.876,114.165 89.56,115.849 v1(89.56,118.75)
NetM1_6: M1.6 R31.1 | length 23.6
  Top w0.2: M1.6 v1(92.583,117.551) v1(92.583,117.551) ; R31.1 95.568,103.925 96.088,104.445 v1(96.088,105.435)
  Bottom w0.2: v1(92.583,117.551) 92.583,111.482 88.849,107.748 88.849,106.995 89.527,106.316 95.207,106.316 v1(96.088,105.435)
NetM1_13: M1.13 R35.2 | length 27.2
  Top w0.2: v1(91.848,107.721) 91.848,107.315 93.825,105.338 R35.2 ; M1.13 105.88,110.35 v1(105.893,110.338)
  Bottom w0.2: v1(91.848,107.721) 97.663,107.721 101.6,103.784 104.851,103.784 105.893,104.826 v1(105.893,110.338)
NetM1_14: M1.14 R34.2 | length 22
  Top w0.2: R34.2 90.957,104.818 90.957,108.229 91.846,109.118 97.257,109.118 98.882,110.744 v1(98.882,113.538) ; v1(102.794,111.455) 102.889,111.55 M1.14
  Bottom w0.2: v1(98.882,113.538) 100.711,113.538 v1(102.794,111.455)
NetM1_16: M1.16 R33.2 | length 30.5
  Top w0.2: R33.2 87.735,102.225 86.9,103.06 86.9,107.17 88.038,108.307 89.845,108.307 91.215,109.677 94.717,109.677 97.862,112.823 97.862,114.052 98.541,114.732 v1(99.771,114.732) ; v1(102.864,113.95) M1.16
  Bottom w0.2: v1(99.771,114.732) 102.083,114.732 v1(102.864,113.95)
NetM1_20: M1.20 S1.8 | length 69
  Top w0.2: v1(84.506,104.064) 84.099,104.47 84.099,109.554 85.086,110.541 85.086,112.035 84.005,113.117 84.005,122.834 v1(85.148,123.977) ; v1(102.484,118.75) M1.20
  Bottom w0.2: v1(84.506,104.064) 84.099,103.657 84.099,92.134 84.608,91.626 84.608,88.367 84,87.759 84,84.772 85.517,83.255 S1.8 ; v1(85.148,123.977) 88.443,123.977 88.443,123.774 89.154,123.063 91.161,123.063 91.516,123.419 97.815,123.419 v1(102.484,118.75)
NetM1_22: M1.22 S1.7 | length 77
  Top w0.2: v1(84.201,81.28) 82.656,82.825 82.656,124.515 83.922,125.781 96.241,125.781 97.815,124.206 105.131,124.206 105.385,123.952 105.385,121.15 M1.22
  Bottom w0.2: v1(84.201,81.28) 84.906,81.985 S1.7
NetM1_23: M1.23 R32.2 | length 30.1
  Top w0.2: R32.2 93.233,102.225 94.234,103.226 94.234,105.613 93.025,106.822 93.025,108.316 93.269,108.56 97.714,108.56 101.575,112.42 101.575,121.385 102.54,122.35 M1.23
NetP2_2: P2.2 R1.1 | length 2.6
  Bottom w0.2: R1.1 86.106,120.425 86.116,120.435 P2.2
NetP2_3: P2.3 R2.1 | length 3
  Bottom w0.2: R2.1 84.825,117.63 86.334,117.63 86.599,117.895 P2.3
NetP2_4: P2.4 R3.1 | length 2.6
  Bottom w0.2: R3.1 86.081,115.4 86.126,115.355 P2.4
NetP2_5: P2.5 R4.1 | length 4.3
  Bottom w0.2: R4.1 83.825,112.37 84.03,112.165 86.775,112.165 P2.5
NetR1_2: R1.2 U1.76 | length 46.3
  Top w0.2: U1.76 103.6,92.862 105.232,94.495 105.232,98.4 106.123,99.29 106.123,100.303 105.816,100.609 104.648,100.609 103.657,101.6 103.657,104.783 104.47,105.596 v1(104.47,107.115)
  Bottom w0.2: R1.2 83.825,120.731 84.531,121.437 90.83,121.437 97.926,114.342 97.926,113.004 98.349,112.582 99.003,112.582 v1(104.47,107.115)
NetR2_2: R2.2 U1.72 | length 90.9
  Top w0.2: v1(103.251,89.332) 103.808,88.775 U1.72 ; v1(106.299,91.135) 106.299,90.221 106.832,89.687 107.219,89.687 107.366,89.541 109.903,89.541 111.883,91.52 111.883,121.848 v1(111.074,122.657)
  Bottom w0.2: R2.2 83.825,117.45 84.384,116.891 87.884,116.891 88.443,117.45 88.443,118.745 87.782,119.405 83.744,119.405 83.312,119.837 83.312,124.485 83.718,124.892 108.839,124.892 v1(111.074,122.657) ; v1(103.251,89.332) 104.496,89.332 v1(106.299,91.135)
NetR3_2: R3.2 U1.89 | length 42.5
  Top w0.2: v1(95.504,90.043) 96.313,90.043 97.1,90.83 U1.89
  Bottom w0.2: R3.2 83.312,115.4 82.956,115.044 82.956,108.661 85.954,105.664 88.062,105.664 88.875,104.851 88.875,102.133 85.475,98.734 85.475,92.775 89.155,92.775 91.887,90.043 v1(95.504,90.043)
NetR5_1: R5.1 R6.2 U1.37 | length 6.4
  Top w0.2: R6.2 93.95,72.825 R5.1 94.75,73.033 97.1,75.383 U1.37
NetR6_1: R6.1 R7.2 | length 1
  Top w0.2: R6.1 R7.2
NetR8_1: R8.1 R9.2 U1.94 | length 14.7
  Top w0.2: R8.1 94.4,94.005 94.375,93.98 R9.2 95.761,93.5 v1(96.215,93.955) ; U1.94 94.6,89.423 95.428,88.595 96.749,88.595 v1(98.171,90.018)
  Bottom w0.2: v1(96.215,93.955) 98.171,91.999 v1(98.171,90.018)
NetR9_1: R9.1 R10.2 | length 1.2
  Top w0.2: R10.2 93.275,94 R9.1
NetR12_2: R12.2 U1.13 | length 20.6
  Top w0.2: U1.13 91.14,84.275 91.696,83.718 v1(91.696,83.414)
  Bottom w0.2: v1(91.696,83.414) 92.103,83.82 97.358,83.82 100.711,80.467 103.462,80.467 104.275,81.28 R12.2
NetR25_1: R25.1 S1.1 | length 11.2
  Bottom w0.2: S1.1 97.003,83.255 98.954,81.303 98.954,77.931 98.95,77.927 R25.1
NetR26_1: R26.1 S1.2 | length 23.7
  Top w0.2: v1(96.266,81.585) 98.196,81.585 v1(99.974,79.807)
  Bottom w0.2: S1.2 95.866,81.985 v1(96.266,81.585) ; v1(99.974,79.807) 108.001,79.807 108.052,79.756 108.052,74.778 107.124,73.85 R26.1
NetR27_1: R27.1 S1.3 | length 39.8
  Bottom w0.2: S1.3 92.653,80.715 90.83,78.892 87.782,78.892 86.63,80.045 83.347,80.045 82.956,79.654 82.956,76.022 84.658,74.32 91.135,74.32 94.131,71.325 R27.1
NetR28_1: R28.1 S1.4 | length 10.4
  Bottom w0.2: S1.4 95.91,79.445 97.18,78.175 97.18,76.647 99.875,73.952 R28.1
NetR34_1: R34.1 U1.48 | length 74.1
  Top w0.2: v1(84.201,82.804) 83.078,83.927 83.078,88.821 84.607,90.351 84.607,101.321 83.566,102.362 83.566,110.49 v1(84.201,111.125) ; R34.1 91.44,103.9 91.719,104.179 91.719,104.978 v1(92.151,105.41) ; v1(98.069,78.816) 101.6,78.816 102.6,77.816 U1.48
  Bottom w0.2: v1(84.201,82.804) 84.303,82.702 90.144,82.702 90.55,82.296 90.55,81.736 90.221,81.407 88.18,81.407 87.85,81.077 87.85,80.467 88.155,80.162 91.034,80.162 91.567,80.696 91.567,81.89 92.253,82.575 96.672,82.575 98.069,81.178 v1(98.069,78.816) ; v1(84.201,111.125) 89.916,105.41 v1(92.151,105.41)
NetR35_1: R35.1 R36.2 U1.47 | length 48.8
  Top w0.2: v1(87.986,103.251) 88.595,102.641 92.541,102.641 R35.1 93.437,103.925 92.862,104.5 R36.2 ; v1(92.71,85.903) 95.098,83.515 95.098,80.162 97.333,77.927 101.803,77.927 102.1,77.63 U1.47
  Bottom w0.2: v1(87.986,103.251) 85.096,100.361 85.096,92.532 85.801,91.827 85.801,87.325 86.817,86.309 92.304,86.309 v1(92.71,85.903)
NetR37_2: R37.2 U1.68 U1.69 | length 49.2
  Top w0.2: U1.69 U1.68 103.257,86.775 101.941,88.091 98.349,88.091 97.819,87.562 97.819,86.661 104.013,80.467 104.013,77.848 104.445,77.416 104.851,77.416 105.355,76.912 105.355,76.131 102.021,72.796 97.825,72.796 96.52,71.491 96.52,69.185 104.755,60.95 R37.2
VDD: C5.2 C6.2 C7.2 C8.2 C9.2 C10.2 C11.2 C12.2 C13.2 C14.2 C15.2 C21.1 C22.1 C23.2 J1.4 L1.2 M1.11 P2.1 R5.2 R8.2 R11.1 R18.2 R19.2 R20.2 R21.2 R22.2 R23.2 R24.1 R25.2 R26.2 R27.2 R28.2 R36.1 U1.6 U1.11 U1.19 U1.28 U1.50 U1.75 U1.100 U2.1 | length 269.6
  Top w0.27: 86.5,86.15 R11.1 ; C15.2 88.316,85.65 88.9,85.275 ; v1(89.356,94.675) 91.6,92.431 U1.100 91.6,90.899 95.556,86.943 ; U1.19 91.918,81.275 ; U1.6 88.9,87.775 88.9,85.275 ; v1(90.297,103.53) 90.371,103.604 90.627,103.349 91.974,103.349 R36.1 ; v1(93.218,75.082) 92.6,75.7 U1.28 92.735,82.093 92.735,83.979 91.439,85.275 U1.11 88.9,85.275 ; R8.2 93.8,94.761 94.975,95.936 ; C5.2 95.504,72.671 R5.2 97.379,74.854 ; 102.863,74.854 103.6,75.59 U1.50 ; 103.383,80.056 103.383,78.479 103.6,78.262 U1.50 ; v1(104.47,76.53) 103.795,76.53 U1.50 ; U1.75 105.15,91.541 105.664,92.055 106.852,92.055 108.25,90.657
  Top w0.45: L1.2 108.25,90.657
  Top w0.5: v1(85.446,79.096) 85.446,80.014 86.157,80.725 C11.2 ; 86.5,86.15 C15.2 ; P2.1 87.425,122.121 84.855,119.551 84.855,113.57 86.875,111.55 M1.11 v1(95.206,111.55) ; v1(89.937,107.275) 89.937,104.038 v1@90.371,103.604 ; C23.2 90.525,60.909 v1(90.931,61.316) ; 91.918,81.275 92.735,82.093 ; v1(93.889,63.932) 95.475,63.932 C8.2 C5.2 ; 94.975,95.936 C12.2 95.788,97.663 100.612,97.663 C9.2 v1(102.375,98.61) 102.375,99.772 103.067,100.463 103.067,102.262 101.927,103.402 ; 95.556,86.943 96.627,85.872 97.567,85.872 103.383,80.056 ; 97.379,74.854 102.863,74.854 ; C22.1 101.6,103.075 101.927,103.402 ; v1(102.083,104.673) 102.083,103.558 101.927,103.402 ; 105.95,73.152 C14.2@105.95,73.636 ; v1(107.163,75.971) 107.163,74.371 106.891,74.1 C14.2 C14.2@105.95,73.636 ; 108.25,90.657 108.25,92.202 109.05,93.002 C7.2 109.05,95.572 107.239,97.384 107.239,99.964 C13.2 109.398,101.275 109.398,100.178 v1(108.991,99.771) ; C10.2 109.05,70.536 C14.2@105.95,73.636 ; v1(109.068,81.153) 110.211,82.296 110.211,82.9 C6.2
  Bottom w0.27: 89.356,96.831 R21.2 ; 90.297,102.143 91.44,101 R23.2 ; 93.599,101 93.878,101 ; 93.599,101.279 93.878,101 ; 93.975,102.713 R22.2 ; R24.1 R18.2 93.878,101
  Bottom w0.45: 95.725,72.575 R28.2 ; 98.875,73.429 R28.2 ; 99.289,71.857 98.875,72.27 R28.2 ; R25.2 100.299,75.825 100.533,75.59 100.533,71.857 ; 104.013,72.542 104.23,72.325 R27.2 104.725,72.796 107.721,72.796 ; 104.013,74.621 104.242,74.85 R26.2 ; v1@104.725,76.275 R26.2 ; 106.677,74.85 R26.2
  Bottom w0.5: v1(85.446,79.096) 84.125,79.096 83.464,78.435 83.464,77.165 83.718,76.911 86.563,76.911 87.046,77.394 94.91,77.394 98.875,73.429 ; C21.1 v1(89.356,94.675) 89.356,96.831 ; v1(89.937,107.275) 91.825,109.163 97.593,109.163 ; 90.297,102.143 v1(90.297,103.53) ; v1(90.931,61.316) 91.273,61.316 91.73,61.773 ; R21.2 R20.2 93.218,99.1 93.818,99.7 R24.1 ; R23.2 R19.2 93.599,101 ; U2.1 91.73,61.773 ; v1(93.218,75.082) 95.725,72.575 ; 93.599,101.279 93.599,102.337 93.975,102.713 ; v1(93.889,63.932) 91.73,61.773 ; v1(95.206,111.55) 97.593,109.163 ; 99.289,71.857 100.533,71.857 ; 100.299,75.825 101.829,75.825 102.804,74.85 104.242,74.85 ; v1(102.083,104.673) 97.593,109.163 ; v1(102.375,98.61) J1.4 107.83,98.61 v1(108.991,99.771) ; 104.013,72.542 104.013,74.621 ; v1(104.47,76.53) v1@104.725,76.275 ; 106.677,74.85 107.163,75.336 v1(107.163,75.971) ; 107.721,72.796 109.068,74.143 v1(109.068,81.153)
VUSB: C24.1 D1.5 F1.1 R37.1 U2.3 | length 50.3
  Top w0.45: 104.445,59.95 R37.1 106.274,59.95 ; 106.528,60.204 106.274,59.95 ; 110.687,59.95 106.274,59.95
  Top w0.5: v1(101.342,68.025) 106.528,62.84 106.528,60.204 ; v1(103.962,60.452) 103.962,60.433 104.445,59.95 ; D1.5 108.262,54.975 108.5,54.737 108.5,53.73 108.915,53.315 111.76,53.315 112.395,53.95 112.395,58.242 110.687,59.95
  Bottom w0.5: U2.3 87.17,64.361 87.782,64.973 92.608,64.973 95.66,68.025 F1.1 v1(101.342,68.025) ; v1(103.962,60.452) 106.075,60.452 C24.1
pads on no net: J1.9 M1.7 M1.8 M1.9 M1.10 M1.15 M1.17 M1.18 M1.19 M1.24 M1.30 M1.31 M1.32 M1.33 M1.34 M1.35 P1.MH1 P1.MH2 U1.1 U1.2 U1.3 U1.4 U1.5 U1.7 U1.8 U1.9 U1.15 U1.16 U1.17 U1.18 U1.23 U1.24 U1.25 U1.26 U1.29 U1.30 U1.31 U1.32 U1.33 U1.35 U1.36 U1.38 U1.39 U1.40 U1.41 U1.42 U1.43 U1.44 U1.45 U1.46 U1.51 U1.52 U1.53 U1.54 U1.55 U1.56 U1.57 U1.58 U1.61 U1.62 U1.64 U1.67 U1.77 U1.81 U1.82 U1.84 U1.85 U1.86 U1.87 U1.88 U1.90 U1.91 U1.92 U1.93 U1.95 U1.96 U1.97 U1.98

## Polygon pours and split planes (outlines as drawn)
GND on Top "Top-No Net" (solid, pour order 5): 82.225,133.2 113.65,133.2 113.65,48.85 82.225,48.85
GND on Bottom "Top-No Net" (solid, pour order 7): 82.225,133.2 113.65,133.2 113.65,48.85 82.225,48.85

## Keep-outs
Keep-Out Layer:
  lines w0.254: 82.225,48.85 113.65,48.85 113.65,126.3 113.65,133.2 82.225,133.2 82.225,51.125 82.225,48.85

## Silkscreen, mask and mechanical layers (free items; w line width, h text height)
Board:
  the board outline again, w0.5

## Text inside footprints (layer, text, board x,y; h text height)
P1: Board "PCB Edge" at 92.602,49.552 h0.25; Board "Alert PCB fab to slot details" at 105.951,51.025 h0.3 r270; Board "Slot 1x2.5mm, PTH" at 105.451,51.025 h0.3 r270; Board "Assign keep-out area to slot" at 106.451,51.025 h0.3 r270; Board "Mech 1 - Slot cut-out" at 104.951,51.025 h0.3 r270; Board "Mech 2 - Clearance, move to internal plane if present" at 104.451,51.025 h0.3 r270